# Altium PCB PCB1.PcbDoc
Units mil, origin at the board's own origin, x right, y up, seen from the top; angles counter-clockwise.
Board outline 2400 x 4000 mil, 2 copper layers (Top Layer, Bottom Layer); 11 components, 11 nets, 74 pads, 0 vias.
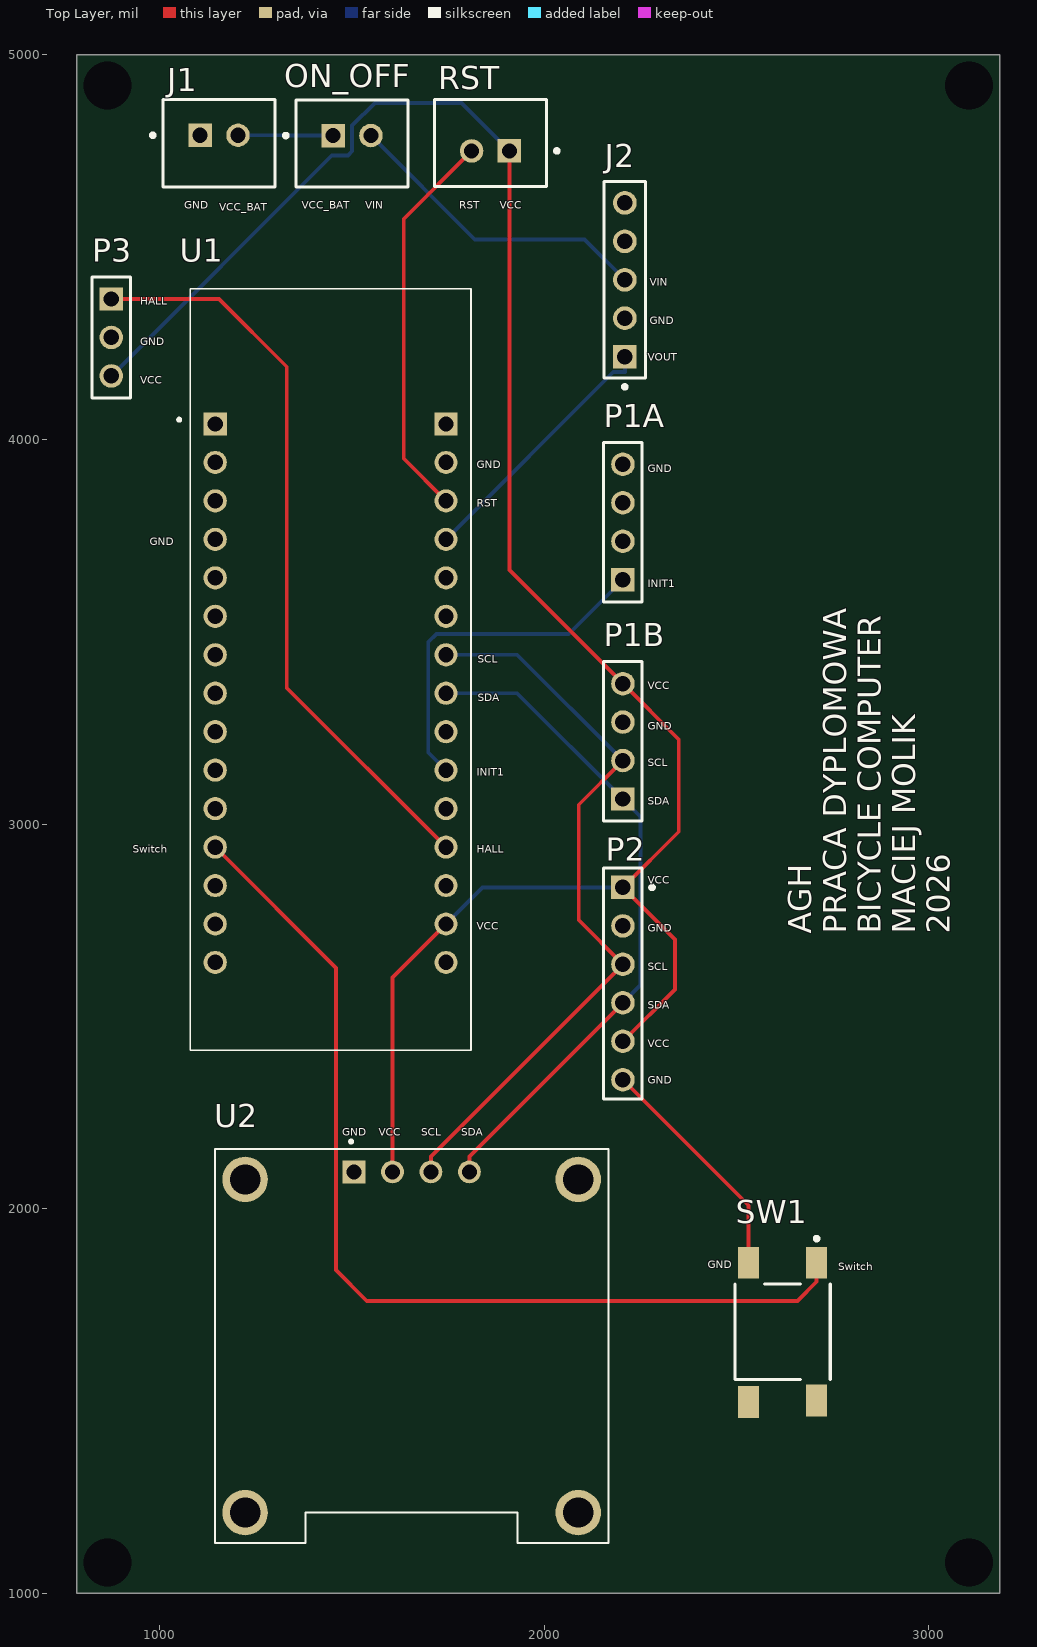
[diagram p0: Top Layer view]
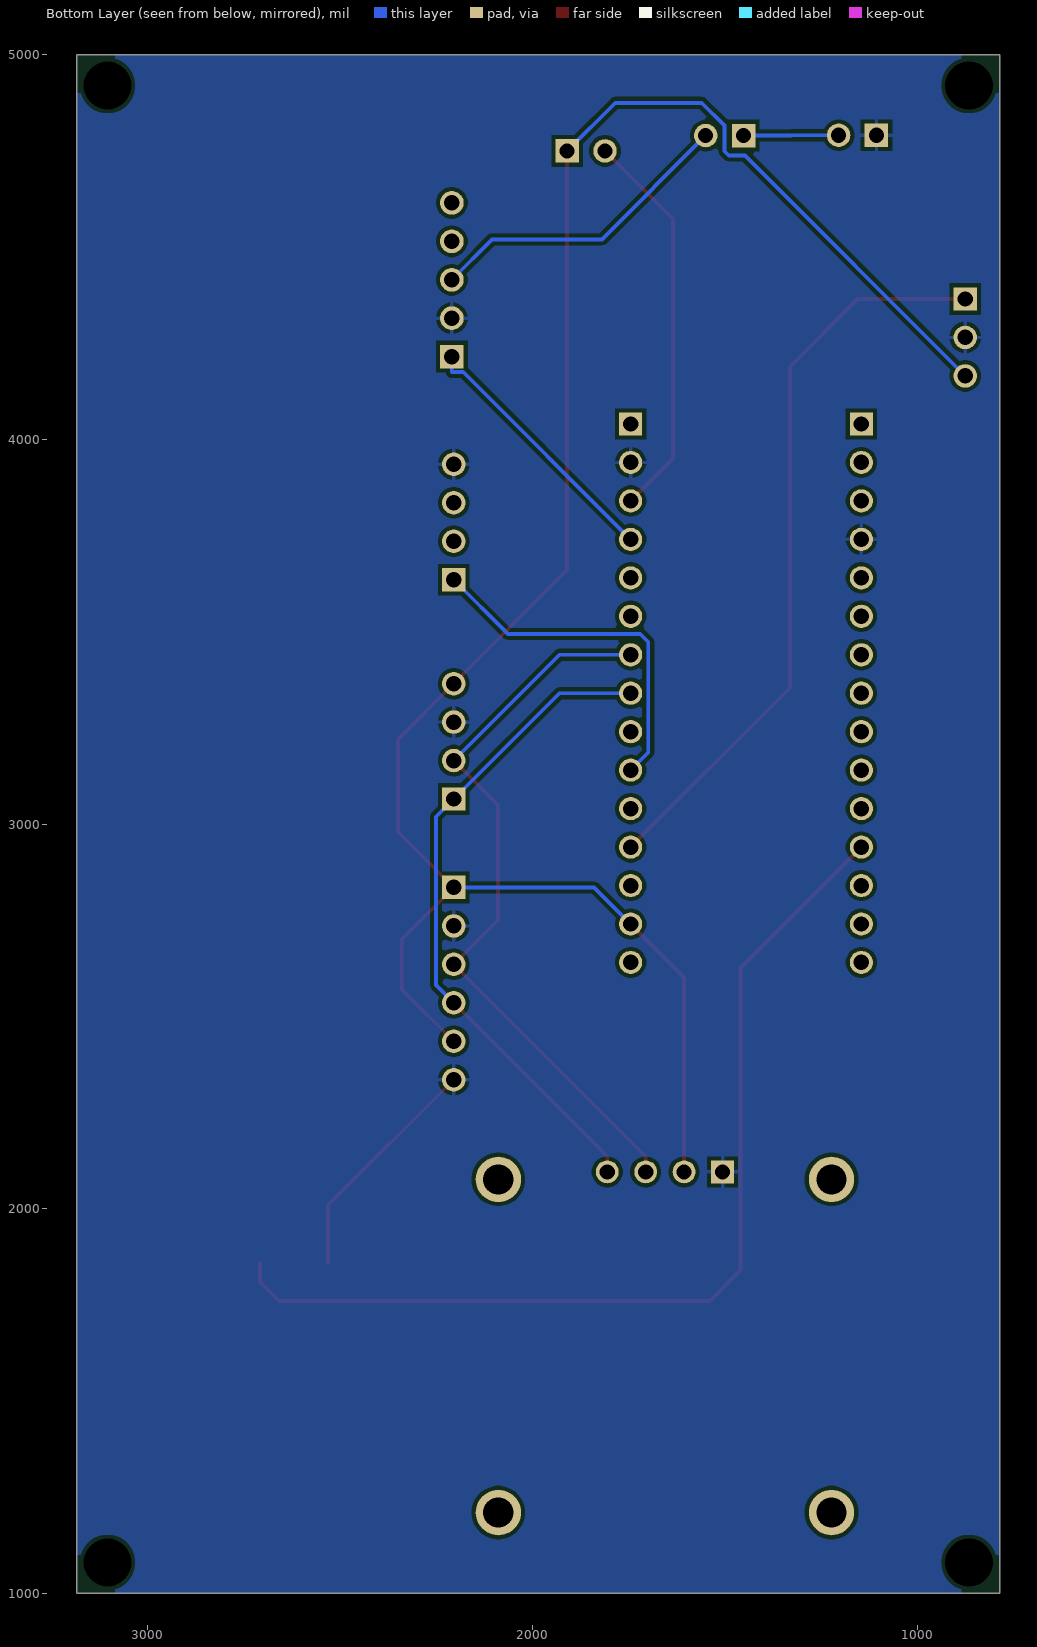
[diagram p1: Bottom Layer view, seen from below]
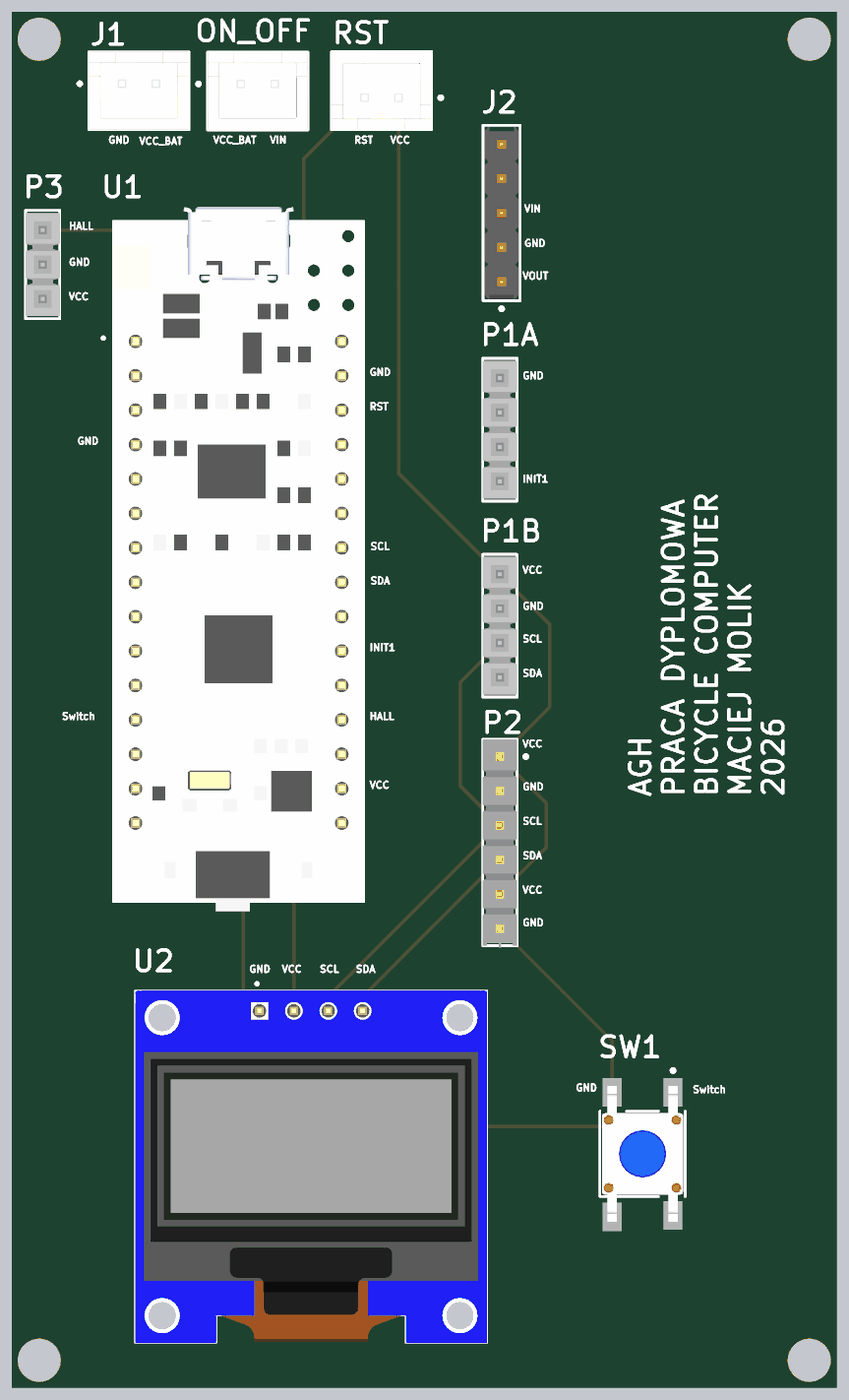
[diagram p2: 3D render of the assembled board from above, using the file's embedded part models]

## Layer stack, top to bottom
Top Solder: solder mask 0.4, Solder Resist, Dk 3.5
Top Layer: signal copper 1.4
Dielectric 1: dielectric 12.6, FR-4, Dk 4.8
Bottom Layer: signal copper 1.4
Bottom Solder: solder mask 0.4, Solder Resist, Dk 3.5

## Board outline
785,1000 3185,1000 3185,5000 785,5000

## Design rules (kind name [scope] priority, off if disabled: settings)
Clearance [All] p1: gap=10 ignorepadtopadclearanceinfootprint=FALSE
HoleSize [All] p1: absolutevalues=TRUE maxlimit=1000 minlimit=1 maxpercent=80.000 minpercent=20.000
PolygonConnect [All] p1: connectstyle=Relief reliefconductorwidth=10 reliefentries=4 polygonreliefangle="90 Angle" airgapwidth=10
RoutingVias [All] p1: holewidth=28 width=50 viastyle="Through Hole" minholewidth=28 minwidth=50 maxholewidth=28 maxwidth=50
SolderMaskExpansion [All] p1: expansion=4 istentingtop=FALSE
SupplyNets "Schematic Supply Nets" [InNet('GND')] p1: voltage=0.000
Width [All] p1: maxlimit=30 minlimit=10 preferedwidth=10
29 further rules are at their usual default settings.

## Classes and differential pairs
component class BC.v.1: J1 ON_OFF P1A P1B P2 P3 RST SW1 U1 U2

## Components (designator, comment, footprint, x,y, rotation, side; value= is the part's Value field where it differs from the comment)
J1 "B2B-XH-A(LF)(SN)" FP-B2B-XH-A_LF_SN-MFG 1155,4770 r0 top
J2 "22-28-4057" FP-22-28-4057-MFG 2210,4415 r90 top
ON_OFF "B2B-XH-A(LF)(SN)" FP-B2B-XH-A_LF_SN-MFG 1500.63,4769.3 r0 top
P1A "TSW-104-08-G-S" SMTC-TSW-104-08-X-S 2205,3635 r90 top
P1B "TSW-104-08-G-S" SMTC-TSW-104-08-X-S 2205,3065 r90 top
P2 "TSW-106-07-S-S" SMTC-TSW-106-07-S-S_V 2205,2585 r270 top
P3 "TSW-103-07-G-S" SMTC-TSW-103-07-X-S 875,4365 r270 top
RST "B2B-XH-A(LF)(SN)" FP-B2B-XH-A_LF_SN-MFG 1860.79,4770.67 r180 top (schematic designator J2)
SW1 "2-1977223-2" FP-2-1977223-2-MFG 2620,1680 r0 top
U1 "NUCLEO-L432KC" MODULE_NUCLEO-L432KC 1445,3401.61 r0 top
U2 "DM-OLED096-636" MODULE_DM-OLED096-636 1655.77,1642.83 r0 top

## Footprints (in the part's own frame and the unit in brackets; to place one, negate y for a bottom-side part, rotate by r counter-clockwise, add the part's x,y. Pads: shape width x height; smd on the part's side, far side on the other; paste and mask are expansions set on the pad)
FP-2-1977223-2-MFG [mm]
  rect 1.4x2.1 smd paste+0 mask+0: 1(2.25,4.55) 2(2.25,-4.55) 3(-2.25,4.55) 4(-2.25,-4.65)
  silkscreen extent -3.15,-3.15 3.15,6.27, body extent -3.25,-5.8 3.25,5.7, height 0.25
FP-22-28-4057-MFG [mm]
  rect 1.57x1.57 hole 1.02 paste-2539.97 mask+0: 1(-5.08,0)
  round 1.57 hole 1.02 paste-2539.97 mask+0: 2(-2.54,0) 3(0,0) 4(2.54,0) 5(5.08,0)
  silkscreen extent -7.2,-1.37 6.48,1.37, body extent -6.58,-1.47 6.58,1.47, height 0.25
FP-B2B-XH-A_LF_SN-MFG [mm]
  rect 1.55x1.55 hole 1 paste-2539.97 mask+0: 1(-1.25,0.525)
  round 1.55 hole 1 paste-2539.97 mask+0: 2(1.25,0.525)
  silkscreen extent -4.5,-2.87 3.7,2.88, body extent -3.8,-2.98 3.8,2.98, height 0.25
MODULE_DM-OLED096-636 [mm]
  rect 1.508x1.508 / inner round 1.508 / far side rect 1.508x1.508 hole 1: 1(-3.81,11.5)
  round 1.508 hole 1: 2(-1.27,11.5) 3(1.27,11.5) 4(3.81,11.5)
  round 3 hole 2: S1(-11,11) S2(11,11) S3(11,-11) S4(-11,-11)
  silkscreen extent -13,-13 13,13.6, body extent -13,-13 13,13, height 5.66
MODULE_NUCLEO-L432KC [mm]
  rect 1.53x1.53 / inner round 1.53 / far side rect 1.53x1.53 hole 1.02: CN3_1(-7.62,16.215) CN4_1(7.62,16.215)
  round 1.53 hole 1.02: CN3_2(-7.62,13.675) CN3_3(-7.62,11.135) CN3_4(-7.62,8.595) CN3_5(-7.62,6.055) CN3_6(-7.62,3.515) CN3_7(-7.62,0.975) CN3_8(-7.62,-1.565) CN3_9(-7.62,-4.105) CN3_10(-7.62,-6.645) CN3_11(-7.62,-9.185) CN3_12(-7.62,-11.725) CN3_13(-7.62,-14.265) CN3_14(-7.62,-16.805) CN3_15(-7.62,-19.345) CN4_2(7.62,13.675) CN4_3(7.62,11.135) CN4_4(7.62,8.595) CN4_5(7.62,6.055) CN4_6(7.62,3.515) CN4_7(7.62,0.975) CN4_8(7.62,-1.565) CN4_9(7.62,-4.105) CN4_10(7.62,-6.645) CN4_11(7.62,-9.185) CN4_12(7.62,-11.725) CN4_13(7.62,-14.265) CN4_14(7.62,-16.805) CN4_15(7.62,-19.345)
  silkscreen extent -10.1,-25.14 9.27,25.14, body extent -9.27,-25.82 9.27,26.18, height 8.5
SMTC-TSW-103-07-X-S [mm] ".025 SQ Post Terminal Strip Assembly, 1x3 Pins, Vertical, 2.54mm Pitch, Male"
  rect 1.55x1.55 hole 1.02: 1(0,0)
  round 1.55 hole 1.02: 2(2.54,0) 3(5.08,0)
  silkscreen extent -1.46,-1.27 6.54,1.27, body extent -1.27,-1.27 6.35,1.27, height 8.38
SMTC-TSW-104-08-X-S [mm] ".025 SQ Post Terminal Strip Assembly, 1x4 Pins, Vertical, 2.54mm Pitch, Male"
  rect 1.55x1.55 hole 1.02: 1(0,0)
  round 1.55 hole 1.02: 2(2.54,0) 3(5.08,0) 4(7.62,0)
  silkscreen extent -1.46,-1.27 9.08,1.27, body extent -1.27,-1.27 8.89,1.27, height 8.38
SMTC-TSW-106-07-S-S_V [mm] "Header, 6-Leads, Body 15.24x2.54mm, Pitch 2.54mm"
  rect 1.55x1.55 hole 1.02: 1(-6.35,0)
  round 1.55 hole 1.02: 2(-3.81,0) 3(-1.27,0) 4(1.27,0) 5(3.81,0) 6(6.35,0)
  silkscreen extent -7.62,-1.27 7.62,2.04, body extent -7.62,-1.27 7.75,1.27, height 8.38

## Part data
J1 ON_OFF RST: library part CMP-2000-05888-3, "CONN HEADER VERT 2POS 2.5MM", Color=Natural, Contact Resistance=20mR, Current Rating=3A, Housing Color=White, Insulation Resistance=1GR, Max Operating Temperature=85°C, Max Voltage Rating (AC)=250V, Min Operating Temperature=-25°C, Connector Type="Male Pin", Contact Material=Brass, Contact Plating=Tin, Contact Type="Male Pin", Depth=5.75mm, Fastening Type=Detent, Housing Material=Polyamide, Lead Free="Lead Free", Lead Pitch=2.5mm, Length=7.4mm, Max Current Rating=3A, Max Voltage Rating (DC)=250V, Mount="Through Hole", Number of Contacts=2, Number of Positions=2, Number of Rows=1, Orientation=Straight, Packaging=Bulk, Pitch=2.5mm, REACH SVHC="No SVHC", Series=XH, Termination=Solder, Voltage Rating=250V, Voltage Rating (AC)=250V, Wire/Cable Gauge=22AWG
J2: library part CMP-04776-001007-1, "KK 100 HDR ASSY BKWY 05 CKT 30 S", Color=Black, Contact Resistance=20mR, Current Rating=4A, Max Operating Temperature=75°C, Max Voltage Rating (DC)=250.25kV, Min Operating Temperature=0°C, Package Quantity=1, Voltage Rating=250V, Connector Type="Male Pin", Contact Material=Brass, Contact Mating Length=0.32inch, Contact Plating=Gold, Contact Type="Male Pin", Gender=Male, Glow Wire Compliant=Non-compliant, Housing Color=Black, Housing Material=Thermoplastic, Lead Free="Lead Free", Mount="Through Hole", Number of Circuits=5, Number of Contacts=5, Number of Positions=5, Number of Rows=1, Orientation=Straight, Packaging=Bulk, Pitch=2.54mm, RoHS Compliant=Yes, Series=42375, Termination=Solder
P1A P1B: library part CMP-1024-00357-1, "0.025\" SQ Post Header, Through-hole, Vertical, -55 to 125 degC, 2.54 mm Pitch, 4-Pin, Male, RoHS", Manufacturer=Samtec, Temperature Range="-55 to 125 degC", ComponentLink1Description="Manufacturer URL", ComponentLink1URL=http://www.samtec.com, ComponentLink2Description=Datasheet, ComponentLink2URL=http://www.samtec.com/documents/webfiles/pdf/TSW_TH.PDF, ComponentLink3Description="Package Specification", ComponentLink3URL=http://www.samtec.com/documents/webfiles/cpdf/TSW-XXX-XX-XXX-X-XX-XXX-MKT.pdf, DatasheetVersion=F-214, Mounting Technology=Through-hole, Orientation=Vertical, PackageDescription=".025[0.64] SQ. Post Terminal Strip Assembly", PackageReference=TSW-104-08-X-S, PackageVersion="DM, 8/1988", PartNumber=TSW-104-08-G-S, Pitch="2.54 mm", RoHS=True
P2: library part CMP-1681-00007-2, "Male Header, Pitch 2.54 mm, 1 x 6 Position, Height 8.38 mm, Tail Length 2.54 mm, -55 to 125 degC, RoHS, Bulk", Colour=Black, Manufacturer=Samtec, Max Operating Temperature="125 degC", Min Operating Temperature="-55 degC", Package Quantity=1, ComponentLink1Description="Manufacturer URL", ComponentLink1URL=http://www.samtec.com/, ComponentLink2Description=Datasheet, ComponentLink2URL=http://suddendocs.samtec.com/catalog_english/tsw_th.pdf, ComponentLink3Description="Package Specification", ComponentLink3URL=http://suddendocs.samtec.com/prints/tsw-xxx-xx-x-x-xx-xxx-footprint.pdf, Contact Finish=Gold, Contact Material=Bronze, Contact Plating=Gold, DatasheetVersion=12/2015, Height="8.38 mm", Lead Pitch="0.1 inch", Length="15.24 mm", Mount="Through Hole", Mounting Technology="Through Hole", PackageDescription="Male Header, Pitch 2.54 mm, 1 x 6 Position, Height 8.38 mm, Tail Length 2.54 mm", PackageReference=TSW-102-07-S-S, Packaging=Bulk, Pins=6, RoHSCompliant=true, Rows=1
P3: library part CMP-1024-00333-1, "0.025\" SQ Post Header, Through-hole, Vertical, -55 to 125 degC, 2.54 mm Pitch, 3-Pin, Male, RoHS", Manufacturer=Samtec, Temperature Range="-55 to 125 degC", ComponentLink1Description="Manufacturer URL", ComponentLink1URL=http://www.samtec.com, ComponentLink2Description=Datasheet, ComponentLink2URL=http://www.samtec.com/documents/webfiles/pdf/TSW_TH.PDF, ComponentLink3Description="Package Specification", ComponentLink3URL=http://www.samtec.com/documents/webfiles/cpdf/TSW-XXX-XX-XXX-X-XX-XXX-MKT.pdf, DatasheetVersion=F-214, Mounting Technology=Through-hole, Orientation=Vertical, PackageDescription=".025[0.64] SQ. Post Terminal Strip Assembly", PackageReference=TSW-103-07-X-S, PackageVersion="DM, 8/1988", PartNumber=TSW-103-07-G-S, Pitch="2.54 mm", RoHS=True
SW1: library part CMP-03407-000026-1, "SWITCH TACTILE SPST-NO 0.05A 24V", RoHS Compliant=Yes
U1: library part CMP-036-000000-1, "STM32L432KC, mbed-Enabled Development Nucleo-32 STM32L4 ARMÂ® CortexÂ®-M4 MCU 32-Bit Embedded Evaluation Board", Package=None, Check_prices=https://www.snapeda.com/parts/NUCLEO-L432KC/STMicroelectronics/view-part/?ref=eda, Component Type=Standard, Design Item ID=NUCLEO-L432KC, MF=STMicroelectronics, MP=NUCLEO-L432KC, Pin Count=30, SnapEDA_Link=https://www.snapeda.com/parts/NUCLEO-L432KC/STMicroelectronics/view-part/?ref=snap, Source=NUCLEO-L432KC.SchLib
U2: library part CMP-038-000001-1, "0.96â€ť 128 X 64 MONOCHROME GRAPHIC OLED DISPLAY MODULE - I2C", Package=Package, Check_prices=https://www.snapeda.com/parts/DM-OLED096-636/Display+Module/view-part/?ref=eda, Component Type=Standard, Design Item ID=DM-OLED096-636, MF="Display Module", MP=DM-OLED096-636, Pin Count=4, SnapEDA_Link=https://www.snapeda.com/parts/DM-OLED096-636/Display+Module/view-part/?ref=snap, Source=DM-OLED096-636.SchLib

## Free pads (board coordinates)
  oval 0x60 hole 125: 2(865,1080) 2(865,4920) 2(3105,1080) 2(3105,4920)

## Nets (pads, with @x,y where several pads share a name; then routed paths per layer and width w, separated by ;. In a path a pad name is that pad's centre, name@x,y a point inside that pad or via, vN(x,y) a via of type N, cw(c..) or ccw(c..) an arc to the next point about the centre after c; other vN are vias at no path point)
GND: J1.1 J2.2 P1A.4 P1B.3 P2.2 P2.6 P3.2 SW1.3 U1.CN3_4 U1.CN4_2 U2.1 | length 611.1
  Top Layer w10: P2.6 2531.42,2008.58 SW1.3
HALL: P3.1 U1.CN4_12 | length 1949.4
  Top Layer w10: P3.1 1155,4365 1331,4189 1331,3354 U1.CN4_12
INIT1: P1A.1 U1.CN4_10 | length 925.2
  Bottom Layer w10: U1.CN4_10 1699,3186 1699,3473 1720,3494 2064,3494 P1A.1
RST: RST.2 U1.CN4_3 | length 1028.7
  Top Layer w10: U1.CN4_3 1635,3950 1635,4573.43 RST.2
SCL: P1B.2 P2.3 U1.CN4_7 U2.3 | length 1945.4
  Top Layer w10: U2.3 1705.77,2135.77 P2.3 2090,2750 2090,3050 P1B.2
  Bottom Layer w10: U1.CN4_7 1930,3440 P1B.2
SDA: P1B.1 P2.4 U1.CN4_8 U2.4 | length 1746.8
  Top Layer w10: U2.4 1805.77,2135.77 P2.4
  Bottom Layer w10: U1.CN4_8 1930,3340 P1B.1 2251,3019 2251,2581 P2.4
Switch: SW1.1 U1.CN3_12 | length 2582.6
  Top Layer w10: U1.CN3_12 1459,2626 1459,1840 1539,1760 2658.58,1760 2708.58,1810 SW1.1
VCC: P1B.4 P2.1 P2.5 P3.3 RST.1 U1.CN4_14 U2.2 | length 5290.7
  Top Layer w10: U2.2 1605.77,2600.77 U1.CN4_14 ; RST.1 1910,3660 P1B.4 2350,3220 2350,2980 P2.1 2340,2700 2340,2570 P2.5
  Bottom Layer w10: P3.3 1448,4738 1490,4738 1501,4749 1501,4816 1560,4875 1785,4875 RST.1 ; U1.CN4_14 1840,2835 P2.1
VCC_battery: J1.2 ON_OFF.1 | length 247.5
  Bottom Layer w10: J1.2 1327,4790.67 1327.7,4789.97 ON_OFF.1
VIN: J2.3 ON_OFF.2 | length 815.5
  Bottom Layer w10: ON_OFF.2 1819.81,4520 2105,4520 J2.3
VOUT: J2.1 U1.CN4_4 | length 685.2
  Bottom Layer w10: U1.CN4_4 2180,4175 2210,4175 J2.1
pads on no net: J2.4 J2.5 P1A.2 P1A.3 SW1.2 SW1.4 U1.CN3_1 U1.CN3_2 U1.CN3_3 U1.CN3_5 U1.CN3_6 U1.CN3_7 U1.CN3_8 U1.CN3_9 U1.CN3_10 U1.CN3_11 U1.CN3_13 U1.CN3_14 U1.CN3_15 U1.CN4_1 U1.CN4_5 U1.CN4_6 U1.CN4_9 U1.CN4_11 U1.CN4_13 U1.CN4_15 U2.S1 U2.S2 U2.S3 U2.S4

## Polygon pours and split planes (outlines as drawn)
GND on Bottom Layer "NONET_L02_P-001" (solid, pour order 1): 785,5000 785,1000 3185,1000 3185,5000

## Silkscreen, mask and mechanical layers (free items; w line width, h text height)
Top Overlay:
  text "GND" at 1065,4600 h20
  text "VCC_BAT" at 1370,4600 h20
  text "VIN" at 1535,4600 h20
  text "RST" at 1780,4600 h20
  text "VCC" at 1885,4600 h20
  text "VCC_BAT" at 1155,4595 h20
  text "VIN" at 2275,4400 h20
  text "HALL" at 950,4350 h20
  text "GND" at 2275,4300 h20
  text "GND" at 950,4245 h20
  text "VOUT" at 2270,4205 h20
  text "VCC" at 950,4145 h20
  text "GND" at 1825,3925 h20
  text "GND" at 2270,3915 h20
  text "RST" at 1825,3825 h20
  text "GND" at 975,3725 h20
  text "INIT1" at 2270,3615 h20
  text "SCL" at 1827.43,3418.77 h20
  text "VCC" at 2270,3350 h20
  text "SDA" at 1827.43,3318.77 h20
  text "GND" at 2270,3245 h20
  text "SCL" at 2270,3150 h20
  text "INIT1" at 1825,3125 h20
  text "SDA" at 2270,3050 h20
  text "Switch" at 930,2925 h20
  text "HALL" at 1825,2925 h20
  text "VCC" at 2270,2845 h20
  text "VCC" at 1825,2725 h20
  text "GND" at 2270,2720 h20
  text "AGH / PRACA DYPLOMOWA / BICYCLE COMPUTER / MACIEJ MOLIK / 2026" at 3055,2715 h60 r90
  text "SCL" at 2270,2620 h20
  text "SDA" at 2270,2520 h20
  text "VCC" at 2270,2420 h20
  text "GND" at 2270,2325 h20
  text "GND" at 1475,2190 h20
  text "VCC" at 1570,2190 h20
  text "SCL" at 1680,2190 h20
  text "SDA" at 1785,2190 h20
  text "GND" at 2425,1845 h20
  text "Switch" at 2765,1840 h20